# Altium PCB TeensyJ1939v2.PcbDoc
Units mil, origin at the board's own origin, x right, y up, seen from the top; angles counter-clockwise.
Board outline 1550.19 x 3685.18 mil, 2 copper layers (Top Layer, Bottom Layer); 34 components, 46 nets, 170 pads, 22 vias.
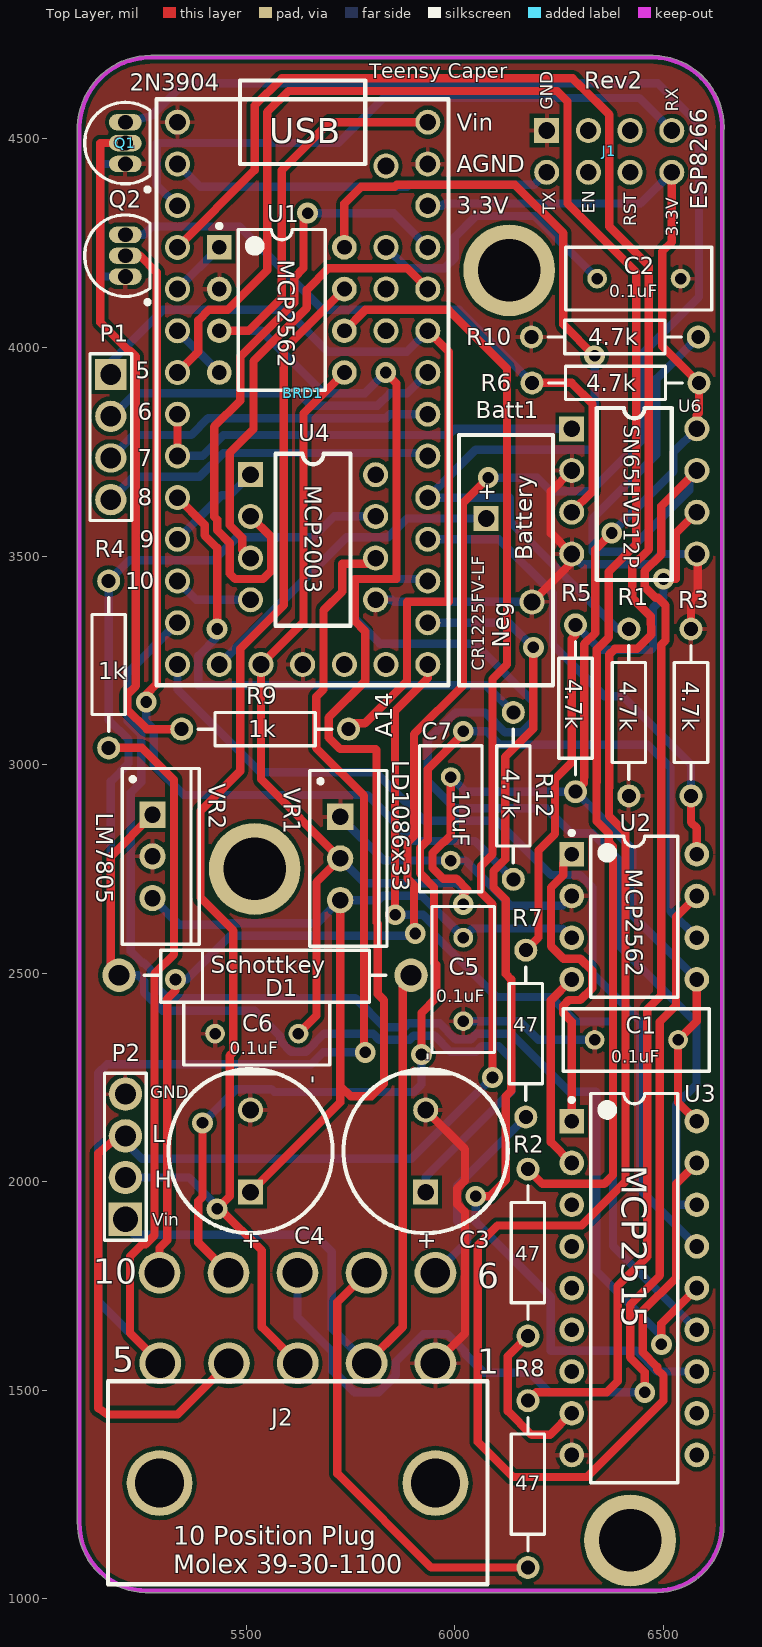
[diagram p0: Top Layer view]
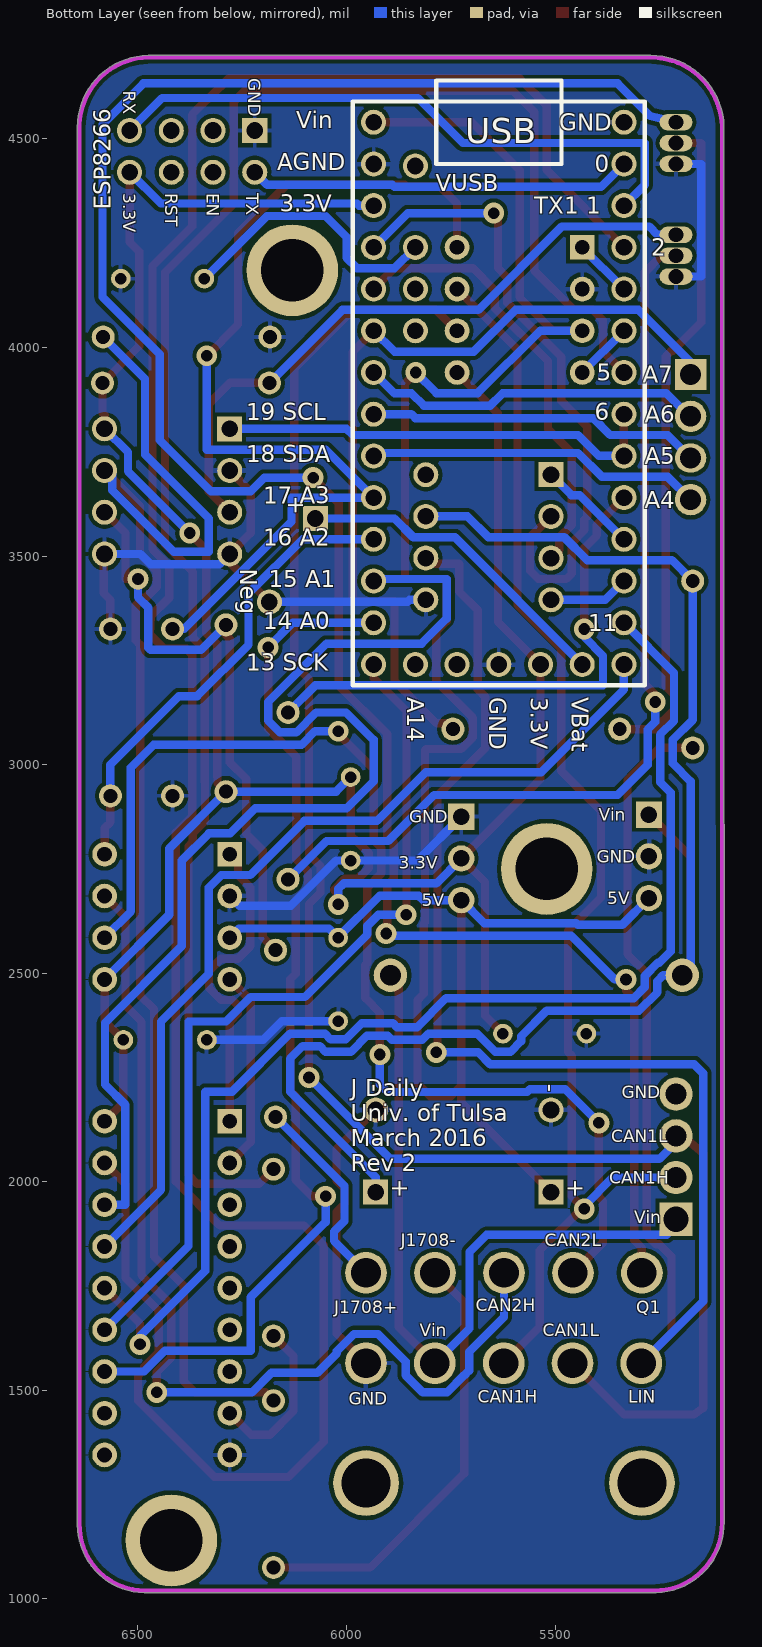
[diagram p1: Bottom Layer view, seen from below]

## Layer stack, top to bottom
Top Solder: solder mask 0.4, Solder Resist, Dk 3.5
Top Layer: signal copper 1.4
Dielectric 1: dielectric 12.6, FR-4, Dk 4.8
Bottom Layer: signal copper 1.4
Bottom Solder: solder mask 0.4, Solder Resist, Dk 3.5

## Board outline
5094.98,1185.44 ccw(c5261.49,1181.49) 5257.47,1014.99 ccw(c5257.59,1020) 5257.59,1014.99 6485,1014.99 ccw(c6485,1020) 6485.08,1014.99 ccw(c6482.5,1177.5) 6645.03,1177.5 ccw(c6482.5,1177.5) 6645.02,1180.04 ccw(c6482.5,1177.5) 6645.01,1180.08 6645.02,1180 6645.02,4520.08 ccw(c6472.6,4527.6) 6645.18,4527.6 ccw(c6472.6,4527.6) 6475.07,4700.16 ccw(c6475,4695.15) 6473.8,4700.02 5270.31,4700.02 ccw(c5270.31,4524.84) 5095.21,4530.15 ccw(c5100.22,4529.99) 5095.21,4529.99

## Design rules (kind name [scope] priority, off if disabled: settings)
Clearance [All] p1: gap=10
PolygonConnect [All] p1: connectstyle=Relief reliefconductorwidth=10 reliefentries=4 polygonreliefangle="90 Angle" airgapwidth=10
RoutingVias [All] p1: holewidth=28 width=50 viastyle="Through Hole" minholewidth=28 minwidth=50 maxholewidth=28 maxwidth=50
SilkToSilkClearance [All] p1: silktosilkclearance=1
SolderMaskExpansion [All] p1: expansion=4
Width [All] p1: maxlimit=50 minlimit=20 preferedwidth=20
29 further rules are at their usual default settings.

## Components (designator, comment, footprint, x,y, rotation, side; value= is the part's Value field where it differs from the comment)
Batt1 "CR1225FV-LF" "Coin Cell with Tabs" 6185,3390 r90 top
BRD1 "Teensy 3.2" Teensy 5335,3240 r0 top
C1 "0.1uF" RAD-0.2 6435,2340 r0 top
C2 "0.1uF" RAD-0.2 6441.02,4165 r180 top
C3 "330 uF" "Elec. Cap 5 x 10mm" 5930,1975 r90 top
C4 "330 uF" "Elec. Cap 5 x 10mm" 5510,1975 r90 top
C5 "0.1uF" RAD-0.2 6020,2485 r90 top
C6 "0.1uF" RAD-0.2 5525,2355 r0 top
C7 "2.2uF" RAD-0.2 5990,2870 r90 top
D1 "Schottkey" DIODE-0.7 5545,2495 r180 top
J1 "ESP8266" ESP8266 6220,4420 r90 top
J2 "10 Pos Mini-Fit Jr." "10 pos Mini-Fit Jr. R/A Header" 5953.27,1565 r0 top
P1 "Header 4" HDR1X4#1 5175,3935 r270 top
P2 "Header 4" HDR1X4#2 5210,1910 r90 top
Q1 "2N3904" TO-92A 5210,4490 r0 top
Q2 "2N3904" TO-92A 5210,4220 r0 top
R1 "4.7k" Axial-0.4 6417.01,3125 r90 top
R2 "47" Axial-0.4 6175,1830 r90 top
R3 "4.7k" Axial-0.4 6566.02,3125 r270 top
R4 "1k" Axial-0.4 5170,3240 r270 top
R5 "4.7k" Axial-0.4 6289,3135 r90 top
R6 "4.7k" Axial-0.4 6385,3915 r180 top
R7 "47" Axial-0.4 6170,2355 r270 top
R8 "47" Axial-0.4 6175,1275 r270 top
R9 "1k" Axial-0.4 5545,3085 r180 top
R10 "4.7k" Axial-0.4 6383.4,4025 r180 top
R12 "4.7k" Axial-0.4 6140,2925 r90 top
U1 "MCP2562" PDIP300-P8 5585,4090 r0 top
U2 "MCP2562" PDIP300-P8 6430,2635 r0 top
U3 "MCP2515-E/P" PDIP300-P18 6430,1745 r0 top
U4 "MCP2003-E/P" DIP8 5510,3695 r0 top
U6 "SN65HVD12P (RS485)" DIP8 6280,3805 r0 top
VR1 "LD1086V33" TO-220AB 5725,2775 r270 top
VR2 "OKI-78SR" TO-220AB 5275,2780 r270 top

## Footprints (in the part's own frame and the unit in brackets; to place one, negate y for a bottom-side part, rotate by r counter-clockwise, add the part's x,y. Pads: shape width x height; smd on the part's side, far side on the other; paste and mask are expansions set on the pad)
"10 pos Mini-Fit Jr. R/A Header" [mm] "Molex 10 position Mini-Fit Jr. Right Angle Header with Pegs, Series 5569"
  round 4 hole 3: 0(-16.8,-7.3) 0(0,-7.3)
  round 2.54 hole 1.803: 1(0,0) 2(-4.191,0) 3(-8.382,0) 4(-12.573,0) 5(-16.764,0) 6(0,5.5) 7(-4.2,5.5) 8(-8.4,5.5) 9(-12.6,5.5) 10(-16.8,5.5)
  silkscreen extent -19.94,-13.46 3.18,-1.1
Axial-0.4 [mm] "Axial Device, Thru-Hole; 2 Leads; 0.4 in Pin Spacing"
  round 1.4 hole 0.85: 1(-5.08,0) 2(5.08,0)
  silkscreen extent -4.06,-1.02 4.06,1.02
"Coin Cell with Tabs" [mil] "Renata Two pins vertical mounting"
  rect 60x60 hole 40: 1(200,110.24)
  round 60 hole 40: 2(0,0)
  silkscreen extent -200,-50 400,175
DIODE-0.7 [mil] "Diode, Thru-Hole; 2 Leads; 0.7 in Pin Spacing"
  round 80 hole 50: 1(-350,0) 2(350,0)
  silkscreen extent -290,-60 290,65
DIP8 [mil]
  rect 60x60 hole 40: 1(0,0)
  round 60 hole 40: 2(0,-100) 3(0,-200) 4(0,-300) 5(300,-300) 6(300,-200) 7(300,-100) 8(300,0)
  silkscreen extent 60,-362 240,50
"Elec. Cap 5 x 10mm" [mil] "2 lead polarized Radial Capacitor with 5 mm lead spacing and 10 mm diameter can"
  rect 60x60 hole 40: 1(0,0)
  round 60 hole 40: 2(196.85,0)
  silkscreen extent -98,-197 295,197
ESP8266 [mil] "WiFi Module - ESP8266 Sparkfun"
  rect 60x60 hole 40: 1(100,0)
  round 60 hole 40: 2(0,0) 3(100,-100) 4(0,-100) 5(100,-200) 6(0,-200) 7(100,-300) 8(0,-300)
HDR1X4#1 [mil] "Connector; Header; 4 Position"
  rect 75x75 hole 50: 1(0,0)
  round 75 hole 50: 2(100,0) 4(300,0)
  oval 70x75 hole 50: 3(200,0)
  silkscreen extent -50,-50 350,50
HDR1X4#2 [mil] "Connector; Header; 4 Position"
  rect 80x80 hole 60: 1(0,0)
  round 80 hole 50: 2(100,0) 3(200,0) 4(300,0)
  silkscreen extent -50,-50 350,50
PDIP300-P8 [mm] "DIP, 8-Leads, Row Spacing 7.62mm, Pitch 2.54mm, Body 9.5x6.6mm"
  rect 1.5x1.5 hole 0.9: 1(-3.81,3.81)
  round 1.5 hole 0.9: 2(-3.81,1.27) 3(-3.81,-1.27) 4(-3.81,-3.81) 5(3.81,-3.81) 6(3.81,-1.27) 7(3.81,1.27) 8(3.81,3.81)
  silkscreen extent -3.93,-4.9 2.65,5.23, body extent -3.55,-4.9 3.55,4.9, height 4.32
PDIP300-P18 [mm] "DIP, 18-Leads, Row Spacing 7.62mm, Pitch 2.54mm, Body 22.9x6.6mm"
  rect 1.5x1.5 hole 0.9: 1(-3.81,10.16)
  round 1.5 hole 0.9: 2(-3.81,7.62) 3(-3.81,5.08) 4(-3.81,2.54) 5(-3.81,0) 6(-3.81,-2.54) 7(-3.81,-5.08) 8(-3.81,-7.62) 9(-3.81,-10.16) 10(3.81,-10.16) 11(3.81,-7.62) 12(3.81,-5.08) 13(3.81,-2.54) 14(3.81,0) 15(3.81,2.54) 16(3.81,5.08) 17(3.81,7.62) 18(3.81,10.16)
  silkscreen extent -3.93,-11.85 2.65,11.85, body extent -3.6,-11.8 3.6,11.8, height 5.33
RAD-0.2 [mm] "Radial Cap, Thru-Hole; 2 Leads; 0.2 in Pin Spacing"
  round 1.2 hole 0.7: 1(-2.54,0) 2(2.54,0)
  silkscreen extent -4.44,-1.91 4.44,1.91
Teensy [mil] "32 bit Arduino Compatible Microcontroller www.pjrc.com/teensy"
  round 60 hole 40: 1(0,0) 2(0,100) 3(0,200) 4(0,300) 5(0,400) 6(0,500) 7(0,600) 8(0,700) 9(0,800) 10(0,900) 11(0,1000) 12(0,1100) 13(0,1200) 14(0,1300) 15(100,0) 16(200,0) 17(300,0) 18(400,0) 19(500,0) 20(600,0) 21(600,100) 22(600,200) 23(600,300) 24(600,400) 25(600,500) 26(600,600) 27(600,700) 28(600,800) 29(600,900) 30(600,1000) 31(600,1100) 32(600,1200) 33(600,1300) 34(500,1195) 35(500,1000) 36(500,900) 37(500,800)
  silkscreen extent -50,-50 650,1400
TO-92A [mm] "TO, Flat Index; 3 In-Line, Axial Leads; Body Dia. 4.5mm; Leads 0.51 x 0.48 mm (max)"
  oval 2x1 hole 0.9: 1(0,-1.27) 2(0,0) 3(0,1.27)
  silkscreen extent -2.48,-2.95 1.5,2.48, body extent -2.48,-2.5 1.5,2.5, height 6.86
TO-220AB [mm] "TO, Thru-Hole, Vertical, Heatsink Mounted; 3 In-Line Leads; Pitch 2.54 mm"
  rect 1.6x1.6 hole 1: 1(-2.54,0)
  round 1.6 hole 1: 2(0,0) 3(2.54,0)
  silkscreen extent -5.35,-1.85 5.35,2.85, body extent -5.4,-1.9 5.4,2.9, height 19.3

## Part data
Batt1: library part "CR2032 Battery Holder", "Coin Cell Battery 3V 2-PIN VERT 48mAh 12.5 x 2.5mm"
BRD1: library part Teensy, "32 Bit Arduino-Compatible Microcontroller"
C1 C2 C5 C6 C7: library part Cap, "CAP CER 0.1UF 50V 10% X7R 0603"
C3 C4: library part "Electrolytic Cap", "CAP ALUM 470UF 20% 63V RADIAL"
D1: library part "Schottky Diode", "DIODE SCHOTTKY 60V 2A AXIAL"
J1: "Sparkfun ESP8266 Module (WRL-13678)"
J2: library part "10 Pos Header"
P1 P2: "Header, 4-Pin"
Q1 Q2: "NPN General Purpose Amplifier"
R1 R3 R5 R6 R10 R12: library part "Chip Resistor", "RES SMD 4.7K OHM 1% 1/8W 0805"
R2: library part "Chip Resistor", "RES SMD 27 OHM 1% 1/8W 0805"
R4 R9: library part "Chip Resistor", "RES SMD 1K OHM 1% 1/10W 0603"
R7 R8: library part "Chip Resistor", "RES SMD 47 OHM 5% 0.4W 0805"
U1 U2: library part MCP2551-I/P, "High-Speed CAN Transceiver, 8-Pin PDIP, Industrial Temperature"
U3: "Stand-Alone CAN Controller With SPI Interface, 18-Pin PDIP, Extended Temperature"
U4: library part MCP2003AT-E/SN, "TXRX LIN BUS BIDIRECT 8DIP"
U6: library part "SN75HVD12D (3.3v RS485)", "IC TRANSCEIVER RS485 3.3V 8-DIP"
VR1: library part "LD1086 VRM", "IC REG LDO 3.3V 1.5A TO220AB"
VR2: library part 7805, "5V DC/DC Converter (7805 replacement)"

## Free pads (board coordinates)
  round 220 hole 150: 0(5520,2750) 0(6130,4185) 0(6420,1140)

## Via types
v1: diameter 50, hole 28, Top Layer to Bottom Layer, 22 vias

## Nets (pads, with @x,y where several pads share a name; then routed paths per layer and width w, separated by ;. In a path a pad name is that pad's centre, name@x,y a point inside that pad or via, vN(x,y) a via of type N, cw(c..) or ccw(c..) an arc to the next point about the centre after c; other vN are vias at no path point)
3V3: BRD1.16 BRD1.31 C1.2 C6.2 C7.2 J1.8 R5.1 R6.1 U1.5 U2.5 U3.18 U6.8 VR1.2 | length 6060.9
  Top Layer w20: C6.2 5668,2398 5668,2718 VR1.2 5535,2965 BRD1.16 5637,3342 5637,3842 U1.5 ; 5971.93,2813.62 5946.38,2788.07 5946.38,2751.93 5971.93,2726.38 6003.39,2726.38 6030,2699.76 6020,2689.76 v1(6020,2665) ; 5975,2815 5990,2830 C7.2 ; R5.1 6309.45,2955.45 6309.45,2969.55 6310,2970.1 6310,3288.74 6336.56,3315.3 6336.56,3515.56 v1(6376,3555) ; J1.8 6520,4253 6497,4230 6497,4003 R6.1 6585,3842.44 6580,3837.44 U6.8 ; U3.18 6535,2190 C1.2 6580,2385 U2.5
  Bottom Layer w20: VR1.2 5784.68,2715.32 6006.68,2715.32 6020,2702 v1(6020,2665) ; BRD1.31 5970,4340 5975,4345 6445,4345 J1.8 ; C7.2 6025,2935 R5.1 6425,2799 6425,2640 U2.5 ; v1(6376,3555) 6524,3703 6524,3749 U6.8
5V0: BRD1.33 C4.1 C5.2 U1.3 U2.3 VR1.3 VR2.3 | length 5371.8
  Top Layer w20: U1.3 5505,4040 5585,4120 5585,4425 5700,4540 BRD1.33 ; C4.1 5725,2190 5725,2230 ; VR1.3 5725,2230 ; v1(5834.06,3940) 5860,3914.06 5860,3445 5760,3445 5760,3344 5785,3319 5785,3200 5697.44,3112.44 5697.44,3065 5725,3037.44 5810,3037.44 5812,3035.44 5812,2621.36 5815,2618.36 5815,2450 5830,2435 5830,2235 5800,2205 5750,2205 5725,2230
  Bottom Layer w20: VR2.3 5339,2616 5445.57,2616 5449.57,2620 5670,2620 VR1.3 5816.68,2675 5827,2685.32 5920.74,2685.32 6020,2586.07 C5.2 6042,2607 6258,2607 U2.3 ; U1.3 5535.94,4040 5685.47,3890.47 5784.53,3890.47 v1(5834.06,3940)
12V0: C3.1 D1.2 R4.1 U4.7 VR2.1 | length 3639.1
  Top Layer w20: D1.2@5175,2495 5175,2780 VR2.1
  Bottom Layer w20: U4.7 5710,3595 5660,3545 5478,3545 5423,3490 5220,3490 R4.1 5170,3107.26 5217.56,3059.7 5217.56,3002.56 5175,2960 5175,2495 5240.93,2495 5255,2480.93 5255,2453.93 5298.93,2410 5520,2410 5581.38,2348.62 5581.38,2336.93 5606.93,2311.38 5643.07,2311.38 5686.69,2355 5803.64,2355 5818.64,2340 5891.36,2340 5901.36,2350 5950.88,2350 5989.5,2311.38 6050.5,2311.38 6064.12,2325 6105,2325 6135,2295 6135,2216 5930,2011 C3.1
"CAN1 RX": BRD1.9 U1.4 | length 141.4
  Bottom Layer w20: BRD1.9 U1.4
"CAN1 TX": BRD1.10 U1.1 | length 141.4
  Bottom Layer w20: BRD1.10 U1.1
CAN1H: J2.3 P2.2 U1.7 | length 3121.1
  Top Layer w20: J2.3 5537,1651.27 5537,1835 5437,1935 v1(5430,1935) 5460,1965 5460,2302 5469,2311 5469,2601.92 5390,2680.92 5390,2889 5485,2984 5485,3277.5 5590,3382.5 5590,3995 U1.7
  Bottom Layer w20: P2.2@5195,2010 5362,2010 5430,1942 v1(5430,1935)
CAN1L: J2.4 P2.3 U1.6 | length 4249.8
  Top Layer w20: P2.3@5195,2110 5145,2068.33 5145,1457.12 5167,1442 5335.27,1442 J2.4 ; U1.6 5785,4090 5985,4090 6125,3950 6125,3240 6090,3205 6090,2784.69 6062.44,2757.13 6062.44,2692.87 6090,2665.31 v1(6090,2250)
  Bottom Layer w20: P2.3@5195,2110 5250,2055 5895,2055 v1(6090,2250)
"CAN2 RX": U2.4 U3.2 | length 481.4
  Top Layer w20: U3.2 6230,2095 6230,2435 U2.4
"CAN2 TX": U2.1 U3.1 | length 778.3
  Top Layer w20: U3.1 6280,2384 6260,2404 6260,2422.57 6272.9,2435.47 6300.52,2435.47 6329.53,2464.49 6329.53,2505.51 6300.52,2534.53 6260.43,2534.53 6230.47,2564.49 6230.47,2705.51 6260,2735.04 6260,2765 U2.1
CAN2H: J2.8 U2.7 | length 2447.5
  Top Layer w20: v1(6455,1495) 6455,1543.93 6420,1578.93 6420,1704.06 6491.38,1775.43 6491.38,2383.62 6530,2422.24 6530,2635 U2.7
  Bottom Layer w20: J2.8 5622.56,1675.44 5706,1592 5706,1547.01 5717.01,1536.01 ; 5718.27,1536.01 5759.27,1495 5817.26,1495 5858.27,1536.01 5858.27,1568.99 5924.27,1635 5982.26,1635 6023.27,1593.99 6023.27,1588.73 6070,1542 6180,1542 6227,1495 v1(6455,1495)
CAN2L: J2.9 U2.6 | length 2850
  Top Layer w20: v1(5395,2141) 5395,1963.64 5385,1953.64 5385,1853.74 J2.9 ; v1(5920,2305) 5920,2405 5955,2440 5955,2519.85 5950,2524.85 5950,2705.88 5916.38,2739.5 5916.38,2800.5 5935,2819.12 5935,2989 6020,3074 v1(6020,3080)
  Bottom Layer w20: v1(5395,2141) 5476,2222 5560,2222 5567,2215 5902,2215 5920,2233 v1(5920,2305) ; v1(6020,3080) 6075.31,3080 6107.87,3047.44 6462.56,3047.44 6517,2993 6517,2648 U2.6
GND: Batt1.2 BRD1.14 BRD1.17 BRD1.32 C1.1 C2.1 C3.2 C4.2 C5.1 C6.1 C7.1 J1.1 J2.1 P2.4 Q1.1 Q2.1 R1.1 R3.1 R10.2 U1.2 U2.2 U3.9 U4.5 U6.2 U6.4 U6.5 VR1.1 VR2.2 | length 3349.8
  Top Layer w20: C3.2 6024,2077.85 6024,2002.64 6005,1983.64 6005,1946.36 6024,1927.36 6024,1635.73 J2.1 ; Batt1.2 6280,3485 U6.4 6230,3555 6230,3655 U6.2 ; R3.1 6566.02,3395 6582.3,3411.28 6582.3,3485 6580,3485 U6.5
  Bottom Layer w20: Q2.1 5150,4170 5150,4440 Q1.1 ; VR1.1 5830,2770 C7.1 6025.02,2770 6133.02,2662 6257,2662 U2.2 ; U4.5 5849,3395 5854,3390 Batt1.2 ; C5.1 6155,2385 6200,2340 C1.1 ; U6.4 6305,3480 6469.07,3480 6494.07,3505 U6.5
J1708+: J2.6 R7.2 | length 483.9
  Bottom Layer w20: J2.6 6030,1858.27 6030,1880.57 6005,1905.57 6005,1990 R7.2
J1708-: J2.7 R8.2 | length 1060.7
  Top Layer w20: J2.7 5718,1711.62 5718,1300 5943,1075 R8.2
NetBatt1_1: Batt1.1 BRD1.15 | length 784.7
  Bottom Layer w20: BRD1.15 5740,3545 5840,3545 5885,3590 Batt1.1
NetBRD1_1: BRD1.1 U3.15 | length 2215.6
  Bottom Layer w20: BRD1.1 5335,3180 5533,2982 5810,2982 5927,2865 6100.94,2865 6230.47,2735.47 6300,2735.47 6330,2705.47 6330,2498.81 6444.63,2384.18 6444.63,1980.37 U3.15
NetBRD1_2: BRD1.2 U3.14 | length 2992.5
  Top Layer w20: v1(6495,1610) 6495,1660 U3.14
  Bottom Layer w20: BRD1.2 5215,3220 5215,3104.69 5248,3071.69 5248,2958 5223,2933 5223,2552 5250,2525 5253.36,2525 5285,2493.36 5285,2466.36 5311.36,2440 5761.07,2440 5831.07,2370 5878.93,2370 5888.93,2380 5963.31,2380 6001.93,2341.38 6038.07,2341.38 6051.69,2355 6135,2355 6274,2216 6338,2216 6339,2215 6339,1786 6495,1630 v1(6495,1610)
NetBRD1_3: BRD1.3 U4.4 | length 193.6
  Bottom Layer w20: BRD1.3 5380,3395 U4.4
NetBRD1_4: BRD1.4 U4.1 | length 239.2
  Bottom Layer w20: BRD1.4 5441,3646 5461,3646 U4.1
NetBRD1_5: BRD1.5 R12.2 | length 1289.9
  Top Layer w20: BRD1.5 5400,3575 5400,3549.44 5430,3519.44 v1(5430,3325)
  Bottom Layer w20: v1(5430,3325) 5430,3305.71 5385,3260.71 5385,3190 6075,3190 R12.2
NetBRD1_6: BRD1.6 BRD1.7 U6.1 | length 1071.9
  Top Layer w20: BRD1.6 BRD1.7
  Bottom Layer w20: BRD1.6 5395,3740 5445,3790 5985,3790 6000,3805 U6.1
NetBRD1_8: BRD1.8 R2.2 | length 4416.4
  Top Layer w20: BRD1.8 5385,3990 5385,4065 5410.47,4090.47 5455.52,4090.47 5550,4184.96 5550,4564 5601,4615 6245,4615 6270,4590 6270,4345 6435,4180 6435,3528.49 6369,3462.49 6369,3305.31 6340,3276.31 6340,2957.67 6339.45,2957.13 6339.45,2864.57 6369,2835.03 6369,2814 6379,2804 6379,2016 6358,1995 6210,1995 R2.2
NetBRD1_11: BRD1.11 U3.17 | length 6141.5
  Top Layer w20: BRD1.11 5520,4425 5520,4580 5585,4645 6282.43,4645 6302.43,4625 6302.43,4625.57 6370,4558 6370,4290 6465,4195 6465,3516.07 6425,3476.07 6425,3400 6469.44,3355.56 6471.02,3311.75 6436.71,3277.44 6383.56,3277.44 6370,3263.88 6370,2945.24 6369.45,2944.7 6369.45,2877 6409,2837.45 6409,2000 6304,1895 6102,1895 6055,1848 6055,1376 6139,1292 6317,1292 6500,1475 6500,1535 6485,1550 6485,1556.36 6450,1591.36 6450,1689.53 6530,1769.53 6530,1995 U3.17
NetBRD1_12: BRD1.12 J1.7 | length 1482.8
  Bottom Layer w20: BRD1.12 5285,4390 5285,4490 5721,4490 5829,4598 6442,4598 J1.7
NetBRD1_13: BRD1.13 J1.2 | length 922.3
  Bottom Layer w20: BRD1.13 5390,4385 5885,4385 5890,4390 6190,4390 J1.2
NetBRD1_20: BRD1.20 U3.13 | length 2095.2
  Top Layer w20: v1(5857,2640) 5856.38,2640.62 5856.38,3128.95 5935,3207.57 BRD1.20
  Bottom Layer w20: v1(5857,2640) 5923.64,2640 5950,2613.64 5950,2593 6100,2443 6230,2443 6289,2384 6379,2384 6379,1846 U3.13
NetBRD1_21: BRD1.21 U3.12 | length 2520.5
  Top Layer w20: v1(6050,1965) 6083,1965 6122,2004 6122,2205 6135,2218 6135,2485 6122,2498 6122,2675.74 6092.44,2705.3 6092.44,2744.7 6120.3,2772.56 6120.3,3018.3 6188,3086 v1(6188,3281)
  Bottom Layer w20: BRD1.21 6129,3340 v1(6188,3281) ; v1(6050,1965) 6050,1903 6230,1723 6230,1595 6435,1595 6485,1545 U3.12
NetBRD1_22: BRD1.22 U3.16 | length 2748.1
  Bottom Layer w20: BRD1.22 5930,3445 5760,3445 5760,3350 5820,3290 6048,3290 6188,3150 6188,3105.74 6159.7,3077.44 6120.3,3077.44 6072.74,3125 6001.36,3125 5936.36,3060 5935,3060 5935,2960 6000,2895 6219,2895 6279,2835 6330,2835 6395,2770 6395,2565 6579,2381 6579,2233 6530.47,2184.47 6530.47,1945 U3.16
NetBRD1_23: BRD1.23 R3.2 U2.8 | length 1148
  Top Layer w20: R3.2 6566.02,2861.42 6580,2847.44 U2.8
  Bottom Layer w20: BRD1.23 6105.71,3540 6235,3410.71 6235,3287 6358,3164 6402.02,3164 6566.02,3000 R3.2
NetBRD1_24: BRD1.24 R1.2 U1.8 | length 2340.7
  Top Layer w20: U1.8 5735,4345 5775,4385 5855.71,4385 5860.71,4390 6144,4390 6260,4274 6260,4055 v1(6335,3980)
  Bottom Layer w20: v1(6335,3980) 6335,3755 6050,3755 BRD1.24 6132,3640 6132,3582.29 6389.29,3325 R1.2
NetBRD1_25: BRD1.25 P1.4 | length 813.4
  Bottom Layer w20: P1.4 5230,3690 5388,3690 5445,3747 5935,3747 BRD1.25
NetBRD1_26: BRD1.26 P1.3 | length 803.5
  Bottom Layer w20: P1.3 5230,3790 5368,3790 5408.47,3830.47 5835,3830.47 5844.53,3840 BRD1.26
NetBRD1_27: BRD1.27 P1.2 | length 828
  Bottom Layer w20: P1.2 5178.28,3835 5233.28,3890 5625.94,3890 5655.47,3860.47 5814.53,3860.47 5844.06,3890 5885,3890 BRD1.27
NetBRD1_28: BRD1.28 P1.1 R9.1 | length 2052.3
  Top Layer w20: R9.1 5758.81,3098.81 5783.81,3098.81 5885,3200 5885,3390 5985,3390 5985,3990 BRD1.28
  Bottom Layer w20: P1.1 5175,3965 5300,4090 5595,4090 5695,3990 5885,3990 BRD1.28
NetBRD1_29: BRD1.29 U4.3 | length 1072.6
  Top Layer w20: U4.3 5490,3515 5490,3544.29 5460,3574.29 5460,3747 5517,3804 5517,3967.15 5645,4095.15 5645,4138 5697,4190 5885,4190 BRD1.29
NetBRD1_30: BRD1.30 U4.2 | length 1558.5
  Top Layer w20: U4.2 5560,3545 5560,3465 5540,3445 5473,3445 5460,3458 5460,3531.86 5430,3561.86 5430,3587.43 5423,3594.43 5423,3810 5485,3872 5485,3977.57 5615,4107.57 5615,4168 5637,4190 5637,4312 v1(5647,4322)
  Bottom Layer w20: v1(5647,4322) 5853,4322 BRD1.30
NetBRD1_35: BRD1.35 C2.2 | length 669.9
  Bottom Layer w20: BRD1.35 5885,4190 5975,4190 6000,4215 6000,4265 6050,4315 6191.02,4315 C2.2
NetJ2_5: J2.5 R4.2 U4.6 | length 4414.1
  Top Layer w20: R4.2 5250,3040 5326.5,2963.5 5326.5,2545.14 5280,2498.64 5280,1871.72 5258.28,1850 5250,1850 5221,1821 5221,1637.27 J2.5 ; v1(5785,2310) 5782,2313 5782,2925.44 5667.44,3040 5667.44,3162.56 5685,3180.12 5685,3370 5730,3415 5730,3481.74 5796.74,3481.74 U4.6
  Bottom Layer w20: J2.5 5145,1713.27 5145,2260 5166.38,2281.38 5655.5,2281.38 5684.12,2310 v1(5785,2310)
NetJ2_10: J2.10 Q1.3 | length 5242.7
  Top Layer w20: J2.10 5291.85,1841.14 5310,1859.29 5310,2438 5330,2458 v1(5330,2485) ; v1(5905,2595) 5905,2585 5902.04,2582.04 5902.04,2711.42 5886.38,2727.08 5886.38,2812.92 5902.04,2828.58 5902.04,3073.04 6019,3190 6019,3627 v1(6080,3688)
  Bottom Layer w20: Q1.3 5272,4555 5350,4633 6487,4633 6585,4535 6585,4121 6448,3984 6448,3778 6325,3655 6230,3655 6197,3688 v1(6080,3688) ; v1(5330,2485) 5357,2485 5462,2590 5900,2590 v1(5905,2595)
NetQ1_2: Q1.2 R9.2 | length 1613.3
  Top Layer w20: Q1.2 5150,4490 5150,4060 5217.5,3992.5 5220.78,3992.5 5235,3978.28 5235,3188.64 5215,3168.64 5215,3131.36 5261.36,3085 R9.2
NetQ2_2: Q2.2 R12.1 | length 2265.9
  Top Layer w20: Q2.2 5245,4220 5285,4180 5285,3193 5260,3168 v1(5260,3150)
  Bottom Layer w20: v1(5260,3150) 5260,3102.11 5278,3084.11 5278,2999 5350,2927 5790,2927 5900,2817 6048,2817 R12.1
NetQ2_3: Q2.3 R6.2 U6.3 | length 1585
  Top Layer w20: R6.2 6280,3915 6330,3865 6330,3655 U6.3
  Bottom Layer w20: Q2.3 5254,4270 5274,4290 5484,4290 5684,4090 6010,4090 R6.2
NetR2_1: R2.1 U3.8 | length 398
  Top Layer w20: R2.1 6127,1582 6127,1450 6184,1393 6228,1393 U3.8
NetR5_2: R5.2 R7.1 U6.6 | length 1428.3
  Top Layer w20: R7.1 6200.47,2585.47 6200.47,2794.47 6240,2834 6240,2965 6280,3005 6280,3301.16 6289,3310.17 R5.2 ; v1(6500,3445) 6530,3445 6530,3555 U6.6
  Bottom Layer w20: R5.2 6349,3275 6470,3275 6475,3280 6475,3376 6500,3401 v1(6500,3445)
NetR8_1: R8.1 R10.1 U6.7 | length 3519.6
  Top Layer w20: R8.1 6195,1495 6363.69,1495 6390,1521.31 6390,1749.53 6461.38,1820.91 6461.38,2413.62 6494.57,2446.82 6494.57,3287.03 6505,3297.46 6505,3382 6487,3400 6481.36,3400 6455,3426.36 6455,3463.64 6495,3503.64 6495,3620 U6.7
  Bottom Layer w20: U6.7 6562,3705 6562,3657.93 6414.07,3510 6330,3510 6330,3590 6483,3743 6483,3924.6 R10.1
RAW: D1.1 J2.2 P2.1 | length 1809.7
  Top Layer w20: J2.2 5875,1651.73 D1.1@5875,2495
  Bottom Layer w20: P2.1@5195,1910 5232.5,1872.5 5664.5,1872.5 5705,1832 5705,1648.27 J2.2
pads on no net: BRD1.18 BRD1.19 BRD1.34 BRD1.36 BRD1.37 J1.3 J1.4 J1.5 J1.6 J2.0 U3.3 U3.4 U3.5 U3.6 U3.7 U3.10 U3.11 U4.8

## Polygon pours and split planes (outlines as drawn)
GND on Top Layer "GND_L01_P000" (solid, remove dead copper, pour order 0): 5115,1080 5175,1020 6580,1020 6630,1070 6630,4590 6525,4695 5210,4695 5115,4600
GND on Bottom Layer "GND_L02_P001" (solid, pour order 1): 5115,1080 5175,1020 6580,1020 6630,1070 6630,4590 6540,4680 5195,4680 5115,4600

## Keep-outs
Keep-Out Layer:
  lines w10: 5270.31,4695 6475,4695 ; 5275.46,4694.92 ccw(c5270.31,4524.84) 5100.22,4529.99 5100,1181.34 ccw(c5261.34,1181.34) 5261.34,1020 6485,1020 ccw(c6482.5,1177.5) 6640,1180 6640,4520.19 ccw(c6472.6,4527.6) 6475,4695.15

## Silkscreen, mask and mechanical layers (free items; w line width, h text height)
Top Overlay:
  text "Teensy Caper" at 5795,4645 h35
  text "Rev2" at 6310,4620 h40
  text "2N3904" at 5220,4615 h40
  text "MCP2562" at 5575,4210 h40 r270
  text "0.1uF" at 6370,4120 h30
  text "4.7k" at 6320,4005 h40
  text "4.7k" at 6315,3895 h40
  text "SN65HVD12P" at 6405,3815 h38 r270
  text "7" at 5240,3715 h40
  text "MCP2003" at 5640,3670 h40 r270
  text "8" at 5240,3620 h40
  text "9" at 5245,3520 h40
  text "10" at 5210,3420 h40
  text "CR1225FV-LF" at 6070,3225 h30 r90
  text "1k" at 5145,3205 h40
  text "4.7k" at 6265,3205 h40 r270
  text "4.7k" at 6395,3200 h40 r270
  text "4.7k" at 6545,3200 h40 r270
  text "1k" at 5505,3065 h40
  text "LD1086x33" at 5850,3010 h40 r270
  text "4.7k" at 6115,2990 h40 r270
  text "10uF" at 5995,2940 h40 r270
  text "LM7805" at 5140,2885 h40 r270
  text "MCP2562" at 6410,2750 h40 r270
  text "0.1uF" at 5955,2430 h30
  text "47" at 6140,2360 h35
  text "0.1uF" at 5460,2305 h30
  text "0.1uF" at 6375,2285 h30
  text "GND" at 5270,2200 h30
  text "L" at 5275,2095 h40
  text "MCP2515" at 6400,2040 h60 r270
  text "H" at 5280,1985 h40
  text "Vin" at 5275,1895 h30
  text "47" at 6145,1810 h35
  text "47" at 6145,1260 h35
Bottom Overlay:
  text "ESP8266" at 6565,4330 h40 r270
  text "A7" at 5290,3915 h40
  text "A6" at 5285,3820 h40
  text "A5" at 5285,3720 h40
  text "A4" at 5285,3615 h40
  text "Vin" at 5395,2865 h30
  text "GND" at 5850,2860 h30
  text "GND" at 5400,2765 h30
  text "3.3V" at 5875,2750 h30
  text "5V" at 5375,2665 h30
  text "5V" at 5820,2660 h30
  text "GND" at 5340,2200 h30
  text "CAN1L" at 5365,2095 h30
  text "J Daily / Univ. of Tulsa / March 2016 / Rev 2" at 5990,2025 h40
  text "CAN1H" at 5370,1995 h30
  text "Vin" at 5310,1900 h30
  text "CAN2L" at 5525,1845 h30
  text "J1708-" at 5870,1845 h30
  text "CAN2H" at 5690,1690 h30
  text "Q1" at 5305,1685 h30
  text "J1708+" at 6030,1685 h30
  text "CAN1L" at 5530,1630 h30
  text "Vin" at 5825,1630 h30
  text "LIN" at 5325,1470 h30
  text "CAN1H" at 5685,1470 h30
  text "GND" at 5995,1465 h30
Mechanical 1:
  text "Dimensions in 0.001 inches" at 6170,4755 h40

## Dimensions
6485,1020 to 6475,4695 on Mechanical 1
6485,1020 to 6130,4185 on Mechanical 1
6485,1020 to 5520,2750 on Mechanical 1
6485,1020 to 6420,1140 on Mechanical 1
5100,1181.34 to 5520,2750 on Mechanical 1
5100,1181.34 to 6420,1140 on Mechanical 1
5100.22,4529.99 to 6130,4185 on Mechanical 1
5100,1181.34 to 6640,1180 on Mechanical 1

## Text inside footprints (layer, text, board x,y; h text height)
Batt1: Top Overlay "Neg" at 6130,3280 h40 r90; Top Overlay "+" at 6095,3630 h40 r90; Top Overlay "Battery" at 6185,3490 h40 r90; Bottom Overlay "Neg" at 6255,3470 h40 r90; Bottom Overlay "+" at 6140,3645 h40 r90
BRD1: Top Overlay "Vin" at 6005,4520 h40; Top Overlay "AGND" at 6005,4420 h40; Top Overlay "3.3V" at 6005,4320 h40; Top Overlay "A14" at 5850,3064.99 h40 r90; Top Overlay "6" at 5240,3825 h40; Top Overlay "5" at 5235,3925 h40; Top Overlay "USB" at 5555,4490 h60; Bottom Overlay "USB" at 5715,4490 h60; Bottom Overlay "VUSB" at 5786.62,4375 h40; Bottom Overlay "GND" at 5490,4520 h40; Bottom Overlay "0" at 5405,4420 h40; Bottom Overlay "11" at 5420,3320 h40; Bottom Overlay "TX1 1" at 5550,4320 h40; Bottom Overlay "2" at 5270,4220 h40; Bottom Overlay "5" at 5400,3920 h40; Bottom Overlay "6" at 5405,3825 h40; Bottom Overlay "A14" at 5854.99,3161.63 h40 r90; Bottom Overlay "VBat" at 5459.99,3161.63 h40 r90; Bottom Overlay "GND" at 5657.49,3161.63 h40 r90; Bottom Overlay "3.3V" at 5558.74,3161.63 h40 r90; Bottom Overlay "18 SDA" at 6239.93,3725 h40; Bottom Overlay "13 SCK" at 6239.93,3225 h40; Bottom Overlay "19 SCL" at 6239.93,3825 h40; Bottom Overlay "16 A2" at 6199.94,3525 h40; Bottom Overlay "Vin" at 6119.97,4525 h40; Bottom Overlay "3.3V" at 6159.95,4325 h40; Bottom Overlay "AGND" at 6166.62,4425 h40; Bottom Overlay "17 A3" at 6199.94,3625 h40; Bottom Overlay "14 A0" at 6199.94,3325 h40; Bottom Overlay "15 A1" at 6186.61,3425 h40
C3: Top Overlay "-" at 5950,2290 h40 r90; Top Overlay "+" at 5950,1835 h40 r90; Bottom Overlay "+" at 5890,1960 h40 r90; Bottom Overlay "-" at 5950,2215 h40 r90
C4: Top Overlay "-" at 5675,2235 h40 r90; Top Overlay "+" at 5530,1835 h40 r90; Bottom Overlay "+" at 5470,1960 h40 r90; Bottom Overlay "-" at 5530,2215 h40 r90
J1: Top Overlay "TX" at 6240,4319.98 h30 r90; Top Overlay "EN" at 6335,4319.98 h30 r90; Top Overlay "RST" at 6435,4289.99 h30 r90; Top Overlay "3.3V" at 6535,4265 h30 r90; Top Overlay "RX" at 6535,4565 h30 r90; Top Overlay "GND" at 6235,4570 h30 r90; Bottom Overlay "3.3V" at 6535,4369.97 h30 r90; Bottom Overlay "RST" at 6435,4369.97 h30 r90; Bottom Overlay "EN" at 6335,4369.97 h30 r90; Bottom Overlay "TX" at 6240,4369.97 h30 r90; Bottom Overlay "RX" at 6535,4614.98 h30 r90; Bottom Overlay "GND" at 6235,4644.97 h30 r90
J2: Top Overlay "10 Position Plug / Molex 39-30-1100" at 5325,1061.67 h45; Top Overlay "1" at 6053.27,1540 h60; Top Overlay "6" at 6053.27,1745 h60; Top Overlay "10" at 5133.27,1755 h60; Top Overlay "5" at 5178.27,1545 h60